# EAGLE board untitled (EAGLE 6.2)

Size 100 x 80 mm. Coordinates in mm from the lower left corner, seen from the top.
Outline: 0,0 100,0 100,80 0,80 0,0
Copper layers (1*16): Top 0.035mm / dielectric 1.5mm / Bottom 0.035mm
Design rules: minimum track width 10mil, minimum drill 24mil, track to track 8mil, track to pad 8mil, pad to pad 8mil, via to via 8mil, smd to smd 8mil, copper to edge 40mil, drill to drill 8mil, minimum pad ring 10mil, minimum via ring 8mil, stop-mask expansion 4mil, vias tented up to drill 0mil, thermal gap 10mil

## Footprints (pad centres in the part's own frame; a part is rotated, then mirrored left to right if it is on the bottom)
C025-024X044 = drill 0.813 pad 1.422 octagon: 1 -1.27,0; 2 1.27,0
DO-1N4148 = drill 0.9: A -3.81,0; C 3.81,0
DIL28-3 = drill 0.813 long: 1 -16.51,-3.81; 2 -13.97,-3.81; 3 -11.43,-3.81; 4 -8.89,-3.81; 5 -6.35,-3.81; 6 -3.81,-3.81; 7 -1.27,-3.81; 8 1.27,-3.81; 9 3.81,-3.81; 10 6.35,-3.81; 11 8.89,-3.81; 12 11.43,-3.81; 13 13.97,-3.81; 14 16.51,-3.81; 15 16.51,3.81; 16 13.97,3.81; 17 11.43,3.81; 18 8.89,3.81; 19 6.35,3.81; 20 3.81,3.81; 21 1.27,3.81; 22 -1.27,3.81; 23 -3.81,3.81; 24 -6.35,3.81; 25 -8.89,3.81; 26 -11.43,3.81; 27 -13.97,3.81; 28 -16.51,3.81
JP2Q = drill 0.914 octagon: 1 -1.27,-1.27; 2 -1.27,1.27; 3 1.27,-1.27; 4 1.27,1.27
LED5MM = drill 0.813 octagon: A -1.27,0; K 1.27,0
0204V = drill 0.813 octagon: 1 -1.27,0; 2 1.27,0
XTAL3215 = smd 1.1 x 1.9: P$1 1.2,0; P$2 -1.2,0
MOLEX_480371000 = smd 1.2 x 2: 1 3.5,2.6; 2 1,2.6; 3 -1,2.6; 4 -3.5,2.6 | drill 2.5: M1 -5.7,0; M2 5.7,0 | hole 1.1: -2.25,0; 2.25,0
IC5 = drill 1.397 long: 1 -10.16,2.54; 1A -10.16,-2.54; 2 -5.08,2.54; 2A -5.08,-2.54; 3 0,2.54; 3A 0,-2.54; 4 5.08,2.54; 4A 5.08,-2.54; 5 10.16,2.54; 5A 10.16,-2.54

## Placement (x,y rotation side)
C1  100n  [C025-024X044]  54.61,24.13 0 top
C2  22u  [C025-024X044]  67.31,59.69 0 top
C3  22u  [C025-024X044]  62.23,59.69 0 top
C4  100n  [C025-024X044]  64.77,25.4 0 top
D4  3V6  [DO-1N4148]  43.18,64.77 0 top
D5  3V6  [DO-1N4148]  33.02,64.77 0 top
IC1  MEGA8-P  [DIL28-3]  50.8,39.37 0 top
JP2  VTarget  [JP2Q]  72.39,50.8 0 top
JP3  slowsck  [JP2Q]  64.77,50.8 0 top
JP4  [JP2Q]  58.42,50.8 0 top
LED1  [LED5MM]  46.99,49.53 0 top
LED2  [LED5MM]  34.29,49.53 0 top
R2  10k  [0204V]  57.15,58.42 0 top
R3  10k  [0204V]  52.07,58.42 0 top
R4  10k  [0204V]  46.99,58.42 0 top
R5  68k  [0204V]  41.91,58.42 0 top
R6  68k  [0204V]  36.83,58.42 0 top
R7  10k  [0204V]  31.75,58.42 0 top
R8  10k  [0204V]  26.67,58.42 0 top
R9  10k  [0204V]  67.31,66.04 0 top
R10  10k  [0204V]  62.23,66.04 0 top
R11  10k  [0204V]  57.15,66.04 0 top
X1  12MHz  [XTAL3215]  52.07,66.04 0 top
X2  USB-A  [MOLEX_480371000]  87.63,39.37 270 top
X3  IC5  [IC5]  15.24,40.64 90 top

## Library data of the parts
C1-C4 D4 D5 R3 R4 X1 X2 = adafruit
IC1 = atmel; OC_FARNELL: unknown; OC_NEWARK: unknown
JP2-JP4 = jumper
LED1 LED2 = led
R2 R5-R11 = rcl
X3 = con-phoenix-508; OC_FARNELL: unknown; OC_NEWARK: unknown

## Nets
+5V: C1.1 C4.1 IC1.1 JP3.4 JP4.4 R2.1 R2.2 R3.2 R4.2 R7.2 X2.4
AVCC: IC1.20
GND: C1.2 C2.1 C2.2 C3.1 C3.2 C4.2 D4.A D5.A IC1.8 IC1.9 IC1.10 IC1.22 JP2.2 X1.P$1 X1.P$2 X2.1
N$1: LED1.A R3.1
N$2: IC1.23 LED1.K
N$3: IC1.24 LED2.K
N$4: LED2.A R4.1
N$5: IC1.25 JP2.4
N$6: D4.C R5.1 X2.3
N$7: D5.C R6.1 X2.2
N$8: IC1.15 R5.2
N$9: IC1.14 R6.2
N$10: JP3.2 R9.2
N$11: IC1.17 R10.1
N$12: IC1.19 R11.1
N$13: IC1.18
N$14: R10.2
N$15: R11.2
N$16: JP4.2 X3.1A
N$17: IC1.2 X3.3A
N$19: R8.2 X3.2A
N$20: IC1.3 R8.1
N$21: R9.1
N$22: X3.4A X3.5 X3.5A
VCC: IC1.7

## Tracks (layer width: path | path; a pad name or v marks a point on that pad's centre or on a via)
+5V  (10 unrouted)
GND  (15 unrouted)
N$1  (1 unrouted)
N$2  (1 unrouted)
N$3  (1 unrouted)
N$4  (1 unrouted)
N$5  (1 unrouted)
N$6  (2 unrouted)
N$7  (2 unrouted)
N$8  (1 unrouted)
N$9  (1 unrouted)
N$10  (1 unrouted)
N$11  (1 unrouted)
N$12  (1 unrouted)
N$16  (1 unrouted)
N$17  (1 unrouted)
N$19  (1 unrouted)
N$20  (1 unrouted)
N$22  (2 unrouted)